# EAGLE board VentaConnected_Arduino_V0.01_2017-11-17 (EAGLE 8.3.2)
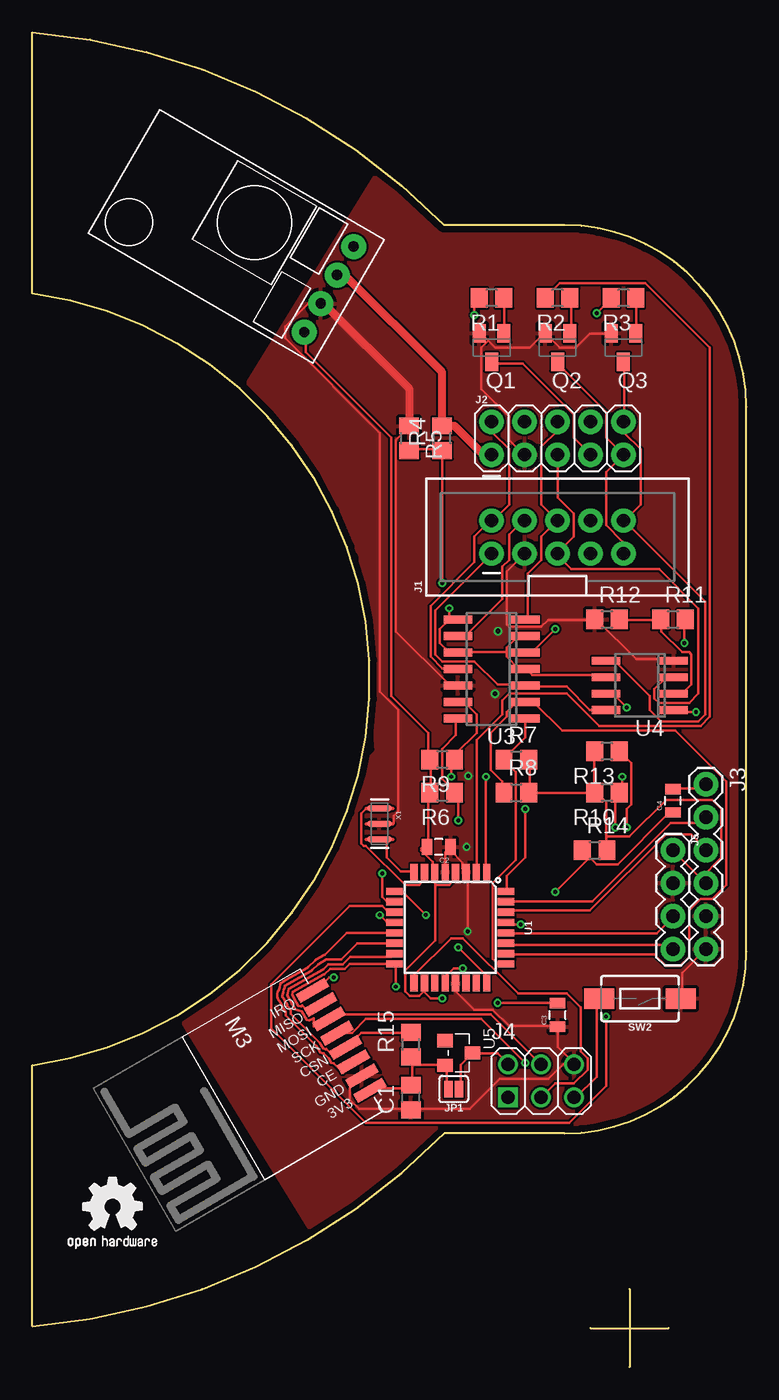
[diagram p0: board, top side]
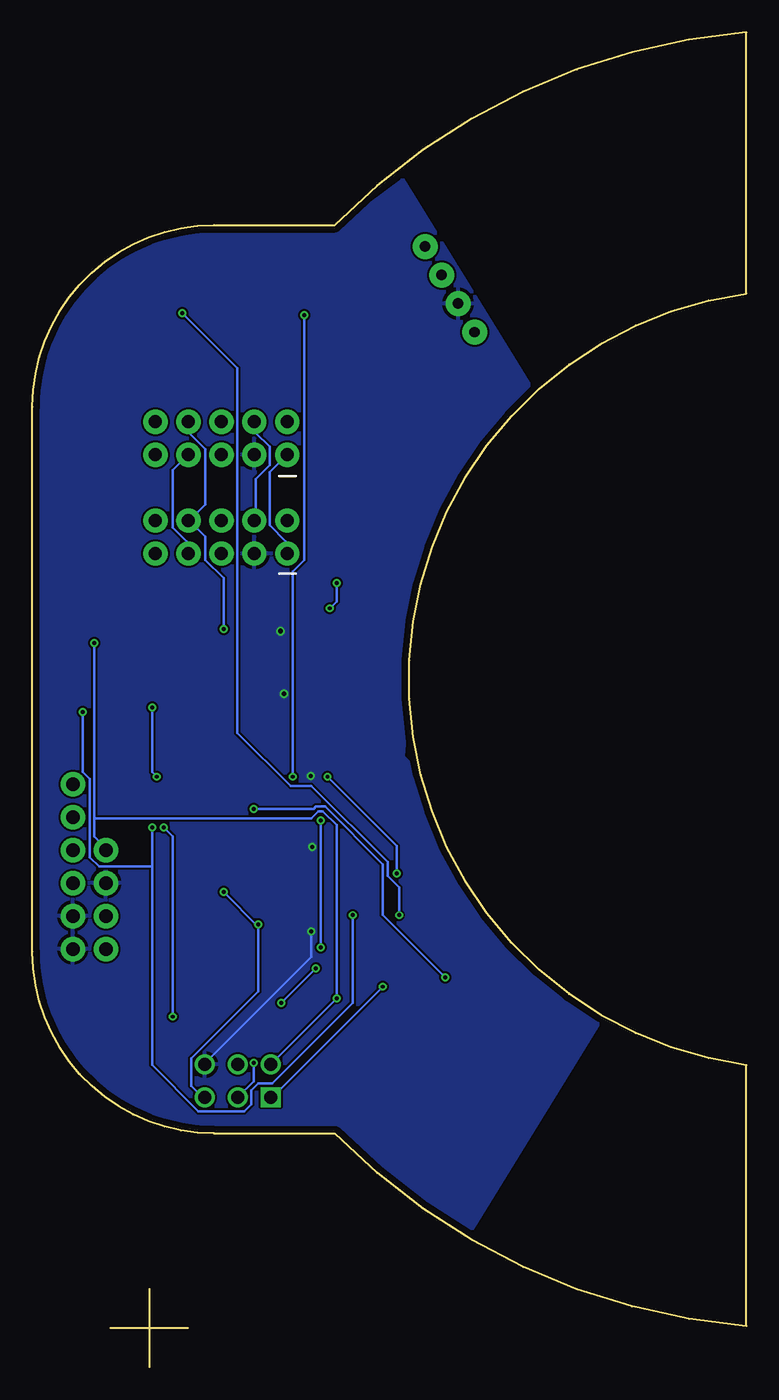
[diagram p1: board, bottom side, seen from below]

Size 55 x 102.85 mm. Coordinates in mm from the lower left corner, seen from the top.
Outline: 46,6 46,0
Outline: 43,3 49,3
Outline: 41,18 arc90 55,32 55,74 arc90 41,88 31.71,88 arc41 0,102.85 0,82.73 arc-165 0,23.27 0,3.16 arc41 31.71,18 41,18
Copper layers (1*16): Top 0.035mm / dielectric 1.6mm / Bottom 0.035mm
Design rules "Elecrow_2-layer_PCB_eagle_rule": minimum track width 6mil, minimum drill 12mil, track to track 6mil, track to pad 6mil, pad to pad 6mil, via to via 8mil, smd to smd 0mil, copper to edge 20mil, drill to drill 10mil, minimum pad ring 6mil, minimum via ring 6mil, stop-mask expansion 0mil, vias tented up to drill 100mil, thermal gap 10mil
Net classes: 0 default: width 0.203 mm; 1 vcc: width 0.254 mm

## Footprints (pad centres in the part's own frame; a part is rotated, then mirrored left to right if it is on the bottom)
C0805 = smd 1.3 x 1.5: 1 -0.95,0; 2 0.95,0
0805 = smd 0.8 x 1.2: 1 -0.9,0; 2 0.9,0
2X5-SHROUDED = drill 1.016 pad 1.88: 1 -1.27,5.08; 2 1.27,5.08; 3 -1.27,2.54; 4 1.27,2.54; 5 -1.27,0; 6 1.27,0; 7 -1.27,-2.54; 8 1.27,-2.54; 9 -1.27,-5.08; 10 1.27,-5.08
2X5 = drill 1.016 pad 1.88: 1 0,0; 2 0,2.54; 3 2.54,0; 4 2.54,2.54; 5 5.08,0; 6 5.08,2.54; 7 7.62,0; 8 7.62,2.54; 9 10.16,0; 10 10.16,2.54
1X06 = drill 1.016 pad 1.88: 1 0,0; 2 2.54,0; 3 5.08,0; 4 7.62,0; 5 10.16,0; 6 12.7,0
2X03 = drill 1.016 square: 1 -2.54,-1.27 | drill 1.016: 2 -2.54,1.27; 3 0,-1.27; 4 0,1.27; 5 2.54,-1.27; 6 2.54,1.27
1X04 = drill 1.016 pad 1.88: 1 0,0; 2 2.54,0; 3 5.08,0; 4 7.62,0
SMT-JUMPER_2_NO_SILK = smd 0.635 x 1.27: 1 -0.406,0; 2 0.406,0
WIRELESS-NRF24L01-SMD = smd 2.54 x 0.762: 1 1.27,0; 2 1.27,1.27; 3 1.27,2.54; 4 1.27,3.81; 5 1.27,5.08; 6 1.27,6.35; 7 1.27,7.62; 8 1.27,8.89
SOT23-BEC = smd 1 x 1.4: B -0.95,-1.1; C 0,1.1; E 0.95,-1.1
R0805 = smd 1.3 x 1.5: 1 -0.95,0; 2 0.95,0
TACTILE_SWITCH_SMD_6.0X3.5MM = smd 2.3 x 1.6: 1 -3.15,0; 2 3.15,0
TQFP32-08 = smd 1.27 x 0.559: 1 -4.293,2.8; 2 -4.293,2; 3 -4.293,1.2; 4 -4.293,0.4; 5 -4.293,-0.4; 6 -4.293,-1.2; 7 -4.293,-2; 8 -4.293,-2.8; 17 4.293,-2.8; 18 4.293,-2; 19 4.293,-1.2; 20 4.293,-0.4; 21 4.293,0.4; 22 4.293,1.2; 23 4.293,2; 24 4.293,2.8 | smd 0.559 x 1.27: 9 -2.8,-4.293; 10 -2,-4.293; 11 -1.2,-4.293; 12 -0.4,-4.293; 13 0.4,-4.293; 14 1.2,-4.293; 15 2,-4.293; 16 2.8,-4.293; 25 2.8,4.293; 26 2,4.293; 27 1.2,4.293; 28 0.4,4.293; 29 -0.4,4.293; 30 -1.2,4.293; 31 -2,4.293; 32 -2.8,4.293
MINI_BUCK_CONVERTER_UPDOWN = drill 0.8 pad 1.93: EN -1.27,1.27; GND -6.35,1.27; IN+ -3.81,1.27; VO+ -8.89,1.27
SO14 = smd 0.6 x 2.2: 1 -3.81,-2.6; 2 -2.54,-2.6; 3 -1.27,-2.6; 4 0,-2.6; 5 1.27,-2.6; 6 2.54,-2.6; 7 3.81,-2.6; 8 3.81,2.6; 9 2.54,2.6; 10 1.27,2.6; 11 0,2.6; 12 -1.27,2.6; 13 -2.54,2.6; 14 -3.81,2.6
SO08 = smd 0.6 x 2.2: 1 -1.905,-2.6; 2 -0.635,-2.6; 3 0.635,-2.6; 4 1.905,-2.6; 5 1.905,2.6; 6 0.635,2.6; 7 -0.635,2.6; 8 -1.905,2.6
SOT-23 = smd 1.016 x 1.2: 1 -0.95,-1.06; 2 0.95,-1.06; 3 0,1.06
RESONATOR-SMD-1:1 = smd 0.45 x 1.905: 1 -1.2,0; 2 0,0; 3 1.2,0

## Placement (x,y rotation side)
C1  10uF  [C0805]  29.15,20.78 90 top
C2  0.1uF  [0805]  31.31,40.08 180 top
C3  0.1uF  [0805]  40.45,27.13 90 top
C4  0.1uF  [0805]  49.34,43.64 90 top
GOLD_ORB_SM1  OSHWLOGO_GOLD_ORB_SM  [OSHW2]  2.35,8.08 0 top
J1  Panel  [2X5-SHROUDED]  40.45,63.96 90 top
J2  Main Board  [2X5]  35.37,70.31 0 top
J3  FTDI Basic  [1X06]  51.88,44.91 270 top
J4  [2X03]  39.18,22.05 0 top
J5  I2C  [1X04]  49.34,39.83 270 top
JP1  3.3V No regulator  [SMT-JUMPER_2_NO_SILK]  32.45,21.41 180 top
M3  NRF24L01+  [WIRELESS-NRF24L01-SMD]  22.67,29.67 210 top
Q1  2N4401  [SOT23-BEC]  35.37,78.56 180 top
Q2  2N4401  [SOT23-BEC]  40.45,78.56 180 top
Q3  2N4401  [SOT23-BEC]  45.53,78.56 180 top
R1  4,7k  [R0805]  35.37,82.38 180 top
R2  47k  [R0805]  40.45,82.38 180 top
R3  47k  [R0805]  45.53,82.38 180 top
R4  1M  [R0805]  31.56,71.58 90 top
R5  1M  [R0805]  29.02,71.58 270 top
R6  10k  [R0805]  31.56,44.27 180 top
R7  10k  [R0805]  37.27,46.81 0 top
R8  10k  [R0805]  37.27,44.27 0 top
R9  10k  [R0805]  31.56,46.81 180 top
R10  10k  [R0805]  44.26,44.27 180 top
R11  1M  [R0805]  49.34,57.61 0 top
R12  1M  [R0805]  44.26,57.61 0 top
R13  10k  [R0805]  44.26,47.45 180 top
R14  10K  [R0805]  43.31,39.83 0 top
R15  56k  [R0805]  29.15,24.84 90 top
SW2  RST  [TACTILE_SWITCH_SMD_6.0X3.5MM]  46.8,28.4 180 top
U1  ATMEGA328P_TQFP  [TQFP32-08]  32.2,33.86 270 top
U2  MINI_BUCK_CONVERTER_UPSIDEDOWN  [MINI_BUCK_CONVERTER_UPDOWN]  26.48,86.82 60 top
U3  LM339  [SO14]  35.37,53.8 90 top
U4  LM393  [SO08]  46.8,52.53 90 top
U5  XC6206P332MR  [SOT-23]  32.83,24.21 270 top
X1  8/16/20MHz  [RESONATOR-SMD-1:1]  26.73,41.86 270 top

## Library data of the parts
C1 R6-R10 R13-R15 = rcl
C2-C4 J3 = SparkFun
GOLD_ORB_SM1 = bfl
J1 = opentools-connectors; PROD_ID: CONN-08671; SF_ID: PRT-08506
J2 = opentools-connectors; PROD_ID: CONN-08499; SF_ID: PRT-0778
J4 = analyzer
J5 = SparkFun-Connectors; PROD_ID: CONN-09696
JP1 = SparkFun-Jumpers
M3 = nrf24l01plus
Q1-Q3 = transistor-neu-to92
R1-R5 R11 R12 = resistor
SW2 = SparkFun-Switches; PROD_ID: SWCH-00815; SF_SKU: COM-08229
U1 = SparkFun-IC-Microcontroller; PROD_ID: IC-09069
U2 = opentools-sensors
U3 U4 = linear
U5 = Seeed-IC; MPN: XC6206P332MR-G
X1 = Testing

## Nets
A0: U1.23
A6: U1.19
A7: U1.22
AREF: C3.2 U1.20
BTN_OPEN: J1.5 J2.5 U4.3
BTN_PWR: J1.7 J2.7 Q1.C
BTN_UD: J1.9 J2.9 Q2.C
D2: M3.1 U1.32
DTR: C4.2 J3.1
GND: C1.1 C2.1 C3.1 J1.3 J2.3 J3.5 J3.6 J4.6 J5.2 M3.7 Q1.E Q2.E Q3.E R5.1 R12.1 SW2.1 U1.3 U1.5 U1.21 U2.GND U3.12 U4.4 X1.2
LED_1: J1.4 J2.4 U3.9
LED_2: J1.6 J2.6 U3.7
LED_3: J1.8 J2.8 U3.5
LED_ERR: J1.10 J2.10 Q3.C U4.5
LED_ON: J1.2 J2.2 U3.11
MISO: J4.1 M3.2 U1.16
MOSI: J4.4 M3.3 U1.15
N$2: Q1.B R1.1
N$5: Q3.B R3.1
N$6: Q2.B R2.1
N$12: U1.8 X1.3
N$13: U1.7 X1.1
NRF_CE: M3.6 U1.13
NRF_CSN: M3.5 R15.2 U1.14
PIN_1: R6.1 U1.24 U3.14
PIN_2: R7.1 U1.25 U3.1
PIN_3: R8.1 U1.26 U3.2
PIN_ERR: R10.1 U1.11 U4.7
PIN_ERRLED: R3.2 U1.12
PIN_ON: R9.1 U1.10 U3.13
PIN_OPEN: R13.1 U1.9 U4.1
PIN_PWR: R1.2 U1.1
PIN_UD: R2.2 U1.2
RESET: C4.1 J4.5 R14.1 SW2.2 U1.29
RXI: J3.3 U1.30
SCK: J4.3 M3.4 U1.17
SCL: J5.3 U1.28
SDA: J5.4 U1.27
TXO: J3.2 U1.31
VCC_2.5V: R11.1 R12.2 U4.2
VCC_3.3V: C1.2 JP1.2 M3.8 R15.1 U5.2
VCC_5V: C2.2 J3.4 J4.2 J5.1 JP1.1 R6.2 R7.2 R8.2 R9.2 R10.2 R11.2 R13.2 R14.2 U1.4 U1.6 U1.18 U2.VO+ U5.3
VCC_12V: R4.1 R5.2 U3.4 U3.6 U3.8 U3.10 U4.6
VCC_24V: J1.1 J2.1 R4.2 U2.IN+ U3.3 U4.8
VSS: U5.1

## Tracks (layer width: path | path; a pad name or v marks a point on that pad's centre or on a via)
AREF  (via drill 0.3)
  Top 0.203: v35.83,28.07 40.45,28.07 C3.2 | v33.16,30.74 32.45,30.74 31.92,30.2 31.92,29.67 U1.20
  Bottom 0.203: v33.16,30.74 v35.83,28.07
BTN_OPEN
  Top 0.203: U4.3 49.34,53.14 48.81,53.14 47.92,52.25 47.92,51.54 48.27,51.18 50.59,51.18 51.3,51.9 51.3,58.47 48.27,61.5 41.52,61.5 40.45,62.56 J1.5 40.45,62.74 41.7,63.98 41.7,65.76 40.45,67.01 J2.5
BTN_PWR
  Top 0.203: Q1.C 35.47,77.32 37.78,77.32 41.7,73.41 41.7,71.63 42.94,70.39 J2.7
  Bottom 0.203: J1.7 43.12,62.74 43.12,63.63 44.18,64.7 44.18,69.14 43.12,70.21 J2.7
BTN_UD
  Top 0.203: Q2.C 40.45,77.32 44.18,73.59 44.18,71.63 45.43,70.39 J2.9 44.18,68.96 44.18,64.87 45.43,63.63 45.43,62.74 J1.9
D2  (via drill 0.3)
  Top 0.203: v37.96,43.01 37.96,39.27 36.54,37.85 36.54,36.78 U1.32 | v23.2,30.03 22.85,30.03 21.96,29.14 21.6,29.14 M3.1
  Bottom 0.203: v37.96,43.01 33.34,43.01 33.16,43.18 32.45,43.18 28,38.74 28,34.83 v23.2,30.03
DTR
  Top 0.203: C4.2 49.34,44.6 51.65,44.6 51.83,44.78 J3.1
GND  (via drill 0.3, 0.35)
  Top 0.203: 25.52,22.56 M3.7 25.34,22.38 24.45,21.49 24.45,20.6 25.16,19.89 29.07,19.89 C1.1 29.25,19.89 33.69,19.89 36.01,22.2 39.74,22.2 41.34,23.8 | 32.09,52.61 32.63,52.61 U3.12 32.09,52.61 | 49.87,28.25 SW2.1 50.05,28.43 50.05,30.38 J3.6 | 35.12,79.1 35.65,78.56 38.32,78.56 39.38,79.63 Q2.E 39.56,79.63 40.63,78.56 41.87,78.56 42.94,79.63 44.54,79.63 Q3.E | 35.12,79.1 34.58,79.63 Q1.E | U4.4 49.34,54.56 46.49,54.56 43.47,57.59 R12.1 43.3,57.59 39.74,57.59 39.2,57.05 36.72,57.05 36.54,57.23 36.54,61.32 J1.3 | 41.34,23.8 41.7,23.45 J4.6 41.34,23.8 | 41.34,23.8 40.45,24.69 C3.1 40.45,26.29 36.72,26.29 35.47,27.54 34.05,27.54 32.63,28.96 32.63,29.49 U1.21 | X1.2 27.83,41.94 27.83,42.47 28.18,42.83 28.18,50.65 26.76,52.07 26.76,71.99 19.47,79.28 19.47,80.17 21.25,81.94 21.96,81.94 U2.GND | v33.52,33.58 33.52,38.03 U1.3 33.13,38.42 33.13,38.89 32.21,39.82 C2.1 31.8,39.67 U1.5 | 32.09,52.61 28,56.7 28,71.45 28.89,72.34 R5.1 | 35.12,79.1 34.58,78.56 34.58,75.36 36.72,73.23 36.72,71.45 37.78,70.39 J2.3
  Top 0.61: U2.GND 22.45,81.96 29.02,75.39 R5.1
  Bottom 0.203: 41.87,23.27 J4.6 41.7,23.45 33.52,31.63 v33.52,33.58 | 37.96,70.21 J2.3 | 37.96,70.21
  other vias: 35.88,56.72 35.62,51.9 33.44,40.08 33.57,45.55
  pour Top: 26.48,91.9 16.32,75.39 16.32,74.12 22.67,67.77 21.4,66.5 25.21,62.69 26.48,47.45 25.21,46.18 22.67,38.56 11.24,27.13 21.4,10.62 32.83,18.24 44.26,18.24 53.15,23.32 55.69,29.67 55.69,74.12 51.88,84.28 42.99,88.09 31.56,88.09
  pour Bottom: 26.48,91.52 16.32,75.01 16.32,73.74 22.67,67.39 21.4,66.12 25.21,62.31 26.48,47.07 25.21,45.8 22.67,38.18 11.24,26.75 21.4,10.24 32.83,17.86 44.26,17.86 53.15,22.94 55.69,29.29 55.69,73.74 51.88,83.9 42.99,87.71 31.56,87.71
LED_1
  Top 0.203: U3.9 33.34,56.34 36.18,59.19 36.18,61.67 36.72,62.21 36.72,64.16 37.78,65.23 J1.4
  Bottom 0.203: J2.4 37.78,72.7 37.78,71.99 36.72,70.92 36.72,69.5 37.78,68.43 37.78,65.23 J1.4
LED_2
  Top 0.203: U3.7 38.14,57.76 38.14,61.14 39.2,62.21 39.2,63.98 J1.6 39.2,66.47 39.2,70.92 40.45,72.16 J2.6
LED_3  (via drill 0.3)
  Top 0.203: v40.27,56.87 38.49,55.09 38.14,55.09 U3.5
  Bottom 0.203: v40.27,56.87 40.27,60.78 41.7,62.21 41.7,63.98 42.94,65.23 | 42.94,65.23 41.7,66.47 41.7,70.74 42.94,71.99 42.94,72.7 J2.8 | 42.94,65.23 J1.8
LED_ERR
  Top 0.203: Q3.C 45.61,77.32 45.61,72.88 J2.10 45.61,72.7 45.61,71.99 46.85,70.74 46.85,66.47 45.61,65.23 | 45.61,65.23 51.83,59.01 51.83,50.3 51.3,49.76 48.45,49.76 47.56,50.65 47.56,51.72 44.9,54.38 44.36,54.38 U4.5 | 45.61,65.23 J1.10
LED_ON
  Top 0.203: U3.11 32.63,53.85 31.56,53.85 30.67,54.74 30.67,58.65 34.05,62.03 34.05,63.98 35.29,65.23 J1.2 35.47,65.23 36.72,66.47 36.72,70.74 35.47,71.99 35.47,72.7 J2.2
MISO  (via drill 0.3)
  Top 0.203: 20.34,28.12 20.01,28.69 20.06,28.9 22.44,30.27 22.5,30.26 22.92,30.69 24.07,30.69 24.44,31.06 U1.16 28,30.91 v28,29.31 | 20.34,28.12 | 20.34,28.12 20.49,27.85 20.7,27.8 20.8,27.86 21.4,27.26 21.53,27.26 M3.2
  Bottom 0.203: v28,29.31 36.54,20.78 J4.1
MOSI
  Top 0.203: 20.26,27.55 20.46,27.49 20.48,27.47 20.75,27.4 21.13,26.75 21.33,26.7 21.65,26.88 21.65,26.24 22.25,26.84 M3.3 22.85,27 23.03,27.18 35.29,27.18 39.03,23.45 J4.4 | 20.26,27.55 | 20.26,27.55 | 20.26,27.55 20.11,27.8 20.05,27.9 19.98,27.97 19.98,28.02 19.96,28.07 19.77,28.39 | 19.77,28.39 | 19.77,28.39 19.63,28.64 | 19.63,28.64 | 19.63,28.64 | 19.63,28.64 19.68,28.85 | 19.68,28.85 | 19.68,28.85 19.76,29.13 21.77,30.3 21.78,30.3 22.39,30.66 22.78,31.04 23.92,31.04 24.47,31.59 27.64,31.59 U1.15
N$2
  Top 0.203: Q1.B 36.36,79.81 36.36,82.3 R1.1
N$5
  Top 0.203: Q3.B 46.49,79.81 46.49,82.3 R3.1
N$6
  Top 0.203: Q2.B 41.52,79.81 41.52,82.3 R2.1
N$12
  Top 0.203: U1.8 29.25,38.2 28.36,38.2 27.29,39.27 27.29,40.69 X1.3
N$13
  Top 0.203: U1.7 30.14,38.03 30.14,37.49 29.78,37.14 28.72,37.14 25.69,40.16 25.52,40.16 25.34,40.34 25.34,42.65 25.69,43.01 25.72,43.06
NRF_CE
  Top 0.203: 21.17,30.77 | 21.17,30.77 | 21.17,30.77 19.53,29.82 19.36,29.72 19.3,29.72 19.23,29.65 19.15,29.6 19.13,29.55 19.09,29.51 19.09,29.48 19.04,29.27 19.02,29.16 18.99,29.01 18.91,28.94 18.86,28.77 18.86,28.59 18.87,28.57 18.86,28.54 18.87,28.53 18.86,28.49 18.89,28.45 18.89,28.39 18.96,28.26 19.06,28.17 19.1,28.09 19.11,28.08 19.12,28.06 | 19.12,28.06 | 19.12,28.06 | 19.12,28.06 19.13,28.06 19.19,27.88 | 19.19,27.88 | 19.19,27.88 | 21.17,30.77 21.26,30.82 21.78,31.35 21.87,31.4 22.48,31.75 22.53,31.78 24.21,33.46 U1.13 | 19.19,27.88 19.27,27.75 19.27,27.68 19.48,27.46 19.53,27.39 19.53,27.09 21.87,24.75 22.02,24.5 22.16,24.25 | 22.16,24.25 | 22.16,24.25 22.37,24.19 | 22.37,24.19 | 22.37,24.19 22.46,24.17 22.84,23.78 23.03,23.45 23.22,23.4 23.94,22.68 23.94,22.73 M3.6
NRF_CSN
  Top 0.203: U1.14 25.04,32.66 23.77,31.4 22.63,31.4 22.02,31.04 21.56,30.59 21.48,30.54 21.47,30.53 19.71,29.51 19.45,29.37 | 19.45,29.37 | 19.45,29.37 | 19.45,29.37 19.43,29.27 19.37,29.07 19.36,29.06 19.33,28.93 19.31,28.83 19.27,28.79 19.27,28.7 19.24,28.62 19.25,28.61 19.24,28.59 19.24,28.54 19.27,28.5 19.33,28.43 19.37,28.35 19.39,28.35 19.39,28.34 | 19.39,28.34 19.45,28.24 19.48,28.14 19.52,28.12 19.58,28.02 19.63,27.93 19.63,27.82 19.77,27.68 19.9,27.45 19.9,27.23 22.15,24.98 22.4,24.55 22.6,24.5 22.62,24.51 23.18,23.95 23.43,23.95 M3.5 24.27,24.69 25.34,25.76 29.07,25.76 R15.2 | 19.39,28.34 | 19.39,28.34
PIN_1  (via drill 0.3)
  Top 0.203: v32.8,32.34 34.94,30.2 34.94,29.67 U1.24 | v32.8,42.12 32.8,44.07 32.63,44.25 R6.1 32.45,44.43 31.56,45.32 31.56,47.63 32.63,48.7 32.63,49.94 U3.14
  Bottom 0.203: v32.8,42.12 v32.8,32.34
PIN_2
  Top 0.203: U1.25 36.36,31.09 35.83,31.09 35.47,31.45 35.47,37.31 37.25,39.09 37.25,45.85 36.36,46.74 R7.1 36.36,46.92 37.96,48.52 37.96,49.94 U3.1
PIN_3
  Top 0.203: U1.26 36.54,31.8 47.92,31.8 48.81,30.91 49.87,30.91 50.59,31.63 50.59,35.18 51.47,36.07 52.36,36.07 53.43,37.14 53.43,45.14 49.52,49.05 40.81,49.05 38.67,51.18 38.14,51.18 U3.2 37.96,51.18 37.25,51.18 36.54,50.47 36.54,50.12 35.29,48.87 35.29,46.03 36.18,45.14 36.18,44.43 R8.1
PIN_ERR  (via drill 0.3)
  Top 0.203: v44.18,27 44.18,21.67 41.34,18.82 25.69,18.82 18.4,26.11 18.4,29.49 24.45,35.54 26.94,35.54 27.29,35.18 27.83,35.18 U1.11 | v44.9,41.58 44.9,44.07 45.07,44.25 R10.1 45.25,44.43 45.43,44.6 v45.43,45.49 | U4.7 44.72,51.9 v45.78,50.83
  Bottom 0.203: v44.18,27 44.18,40.87 v44.9,41.58 | v45.78,50.83 45.78,45.85 v45.43,45.49
PIN_ERRLED  (via drill 0.3)
  Top 0.203: v26.76,34.83 27.29,34.29 27.83,34.29 U1.12 | v43.47,81.23 44.54,82.3 R3.2
  Bottom 0.203: v26.76,34.83 26.76,36.96 27.65,37.85 27.65,38.92 33.52,44.78 35.12,44.78 39.2,48.87 39.2,76.97 v43.47,81.23
PIN_ON  (via drill 0.3)
  Top 0.203: v26.94,38.03 26.94,36.25 27.29,35.89 27.83,35.89 U1.10 | v32.27,45.49 32.27,46.56 32.45,46.74 R9.1 32.63,46.92 32.63,47.27 34.23,48.87 34.23,50.3 33.34,51.18 32.8,51.18 U3.13
  Bottom 0.203: v26.94,38.03 26.94,40.16 v32.27,45.49
PIN_OPEN  (via drill 0.3)
  Top 0.203: v30.31,34.83 28.54,36.6 28,36.6 U1.9 | v45.78,41.58 45.78,43.01 46.14,43.36 46.14,46.56 45.25,47.45 R13.1 | v51.12,50.47 49.52,50.47 U4.1
  Bottom 0.203: v30.31,34.83 30.31,28.07 36.54,21.85 37.6,21.85 38.14,21.31 38.14,20.25 38.67,19.71 42.23,19.71 45.78,23.27 45.78,38.56 | v45.78,41.58 45.78,38.56 | v51.12,50.47 51.12,45.85 50.59,45.32 50.59,39.27 49.87,38.56 45.78,38.56
PIN_PWR  (via drill 0.3)
  Top 0.203: v34.94,45.49 34.94,38.2 U1.1 | v34.05,81.05 34.05,81.94 34.41,82.3 R1.2
  Bottom 0.203: v34.94,45.49 34.94,61.32 34.05,62.21 v34.05,81.05
PIN_UD
  Top 0.203: U1.2 34.23,38.2 34.23,48.34 36.18,50.3 36.18,51.36 36.72,51.9 41.16,51.9 43.65,49.41 51.47,49.41 52.19,50.12 52.19,78.56 47.21,83.54 40.63,83.54 39.56,82.48 R2.2
RESET  (via drill 0.3)
  Top 0.203: 42.94,39.27 42.41,39.8 R14.1 42.94,39.27 | 42.94,39.27 43.47,38.74 45.07,38.74 48.98,42.65 49.34,42.65 C4.1 | v37.6,34.11 36.54,34.11 U1.29 | SW2.2 43.47,28.25 43.47,22.38 41.87,20.78 J4.5 | v40.27,36.6 42.94,39.27
  Bottom 0.203: 37.6,33.94 37.6,28.96 42.76,23.8 42.76,21.67 41.87,20.78 J4.5 | 37.6,33.94 v40.27,36.6 | 37.6,33.94 v37.6,34.11
RXI
  Top 0.203: U1.30 36.54,35.18 42.94,35.18 48.81,41.05 50.76,41.05 51.83,39.98 J3.3
SCK  (via drill 0.3)
  Top 0.203: U1.17 29.43,29.67 29.43,30.2 32.27,33.05 33.16,33.05 37.43,28.78 41.16,28.78 42.23,27.71 42.23,24.34 42.76,23.8 42.76,22.91 41.7,21.85 40.27,21.85 39.2,20.78 J4.3 | v37.96,23.45 34.58,26.82 25.69,26.82 24.63,25.76 23.56,25.76 M3.4
  Bottom 0.203: v37.96,23.45 37.96,22.02 39.2,20.78 J4.3
SCL
  Top 0.203: U1.28 36.54,33.4 48.09,33.4 49.34,34.65 J5.3
SDA
  Top 0.203: U1.27 36.54,32.52 49.16,32.52 49.34,32.34 J5.4
TXO
  Top 0.203: U1.31 36.54,35.89 43.12,35.89 49.16,41.94 51.47,41.94 51.83,42.29 J3.2
VCC_2.5V
  Top 0.203: R12.2 45.25,57.59 48.27,57.59 R11.1 48.45,57.59 48.45,56.7 50.05,55.09 50.59,55.09 50.76,54.92 50.76,52.61 50.05,51.9 U4.2
VCC_3.3V
  Top 0.203: JP1.2 31.92,21.49 31.92,23.09 U5.2 31.74,23.27 29.25,23.27 | 29.25,23.27 29.25,23.8 R15.1 29.25,23.27 | 29.25,23.27 29.25,21.85 C1.2 29.07,21.67 28.89,21.49 26.05,21.49 M3.8
VCC_5V  (via drill 0.3)
  Top 0.203: R7.2 38.32,46.74 38.32,44.43 R8.2 38.32,44.25 43.3,44.25 R10.2 | R10.2 43.3,44.43 43.3,47.45 R13.2 | 44.18,40.87 44.18,43.54 43.47,44.25 R10.2 | 44.18,40.87 44.18,39.98 R14.2 | v50.23,55.81 50.23,57.59 R11.2 | 51.47,37.67 49.34,39.8 J5.1 | 51.47,37.67 51.83,37.31 J3.4 51.47,37.67 | 44.18,40.87 45.96,40.87 48.81,43.72 52.36,43.72 53.07,43.01 53.07,39.27 51.47,37.67 | J4.2 36.54,23.45 35.83,24.16 34.05,24.16 U5.3 33.87,24.16 32.98,23.27 32.98,21.49 JP1.1 | 30.14,28.96 30.14,29.49 U1.18 30.14,28.96 | 30.14,28.96 29.78,28.6 29.07,28.6 28.72,28.96 28.72,30.56 31.03,32.87 31.03,37.14 | 31.03,37.14 31.03,38.03 U1.6 30.85,38.2 30.85,38.92 29.96,39.8 C2.2 29.96,39.98 30.49,40.52 30.49,44.25 R6.2 30.67,44.43 30.67,46.74 R9.2 30.49,46.92 30.49,48.87 27.65,51.72 27.65,71.63 21.07,78.21 21.07,79.63 U2.VO+ | 31.03,37.14 32.09,37.14 32.45,37.49 32.45,38.03 U1.4 | v31.56,28.43 30.67,28.43 30.14,28.96
  Bottom 0.203: 50.23,42.29 50.23,40.87 49.34,39.98 J5.1 | 50.23,42.29 v50.23,55.81 | J4.2 36.54,23.45 v31.56,28.43 31.56,41.76 32.63,42.83 32.98,42.83 33.52,42.29 50.23,42.29
VCC_12V  (via drill 0.3)
  Top 0.203: R5.2 29.07,70.74 31.56,70.74 R4.1 v31.56,60.43 | 36.54,55.09 36.54,55.45 37.43,56.34 U3.6 | 36.54,55.09 36.54,54.74 37.43,53.85 37.96,53.85 U3.4 38.14,53.67 38.49,53.32 44.18,53.32 U4.6 | 32.09,57.59 31.38,56.87 31.38,55.81 32.09,55.09 32.63,55.09 U3.10 32.8,55.09 36.54,55.09 | 32.09,57.59 32.63,57.59 U3.8 32.09,57.59 | 32.09,57.59 v32.09,58.47
  Bottom 0.203: v31.56,60.43 31.56,59.01 v32.09,58.47
VCC_24V
  Top 0.203: U4.8 44.18,50.65 42.94,50.65 41.16,52.43 38.14,52.43 U3.3 37.96,52.61 35.83,52.61 34.05,54.38 31.56,54.38 31.03,54.92 31.03,58.3 35.29,62.56 J1.1
  Top 0.61: J2.1 34.73,70.31 32.52,72.53 R4.2 31.56,76.66 23.94,84.28 23.6,84.28 U2.IN+
  Bottom 0.203: J2.1 36.72,68.96 36.72,64.87 35.47,63.63 35.47,62.74 J1.1

## Text on the board
bOrigins: VentaConnected for atmega / R. Kainhofer / Version 0.001, 14. 11.2017